# Altium PCB EVB_gate driver.PcbDoc
Units mm, origin at the board's own origin, x right, y up, seen from the top; angles counter-clockwise.
Board outline 29.97 x 33.27 mm, 2 copper layers (TOP Assembly Layer, Bottom Layer), stack 0.142 mm thick; 26 components, 19 nets, 81 pads, 8 vias.
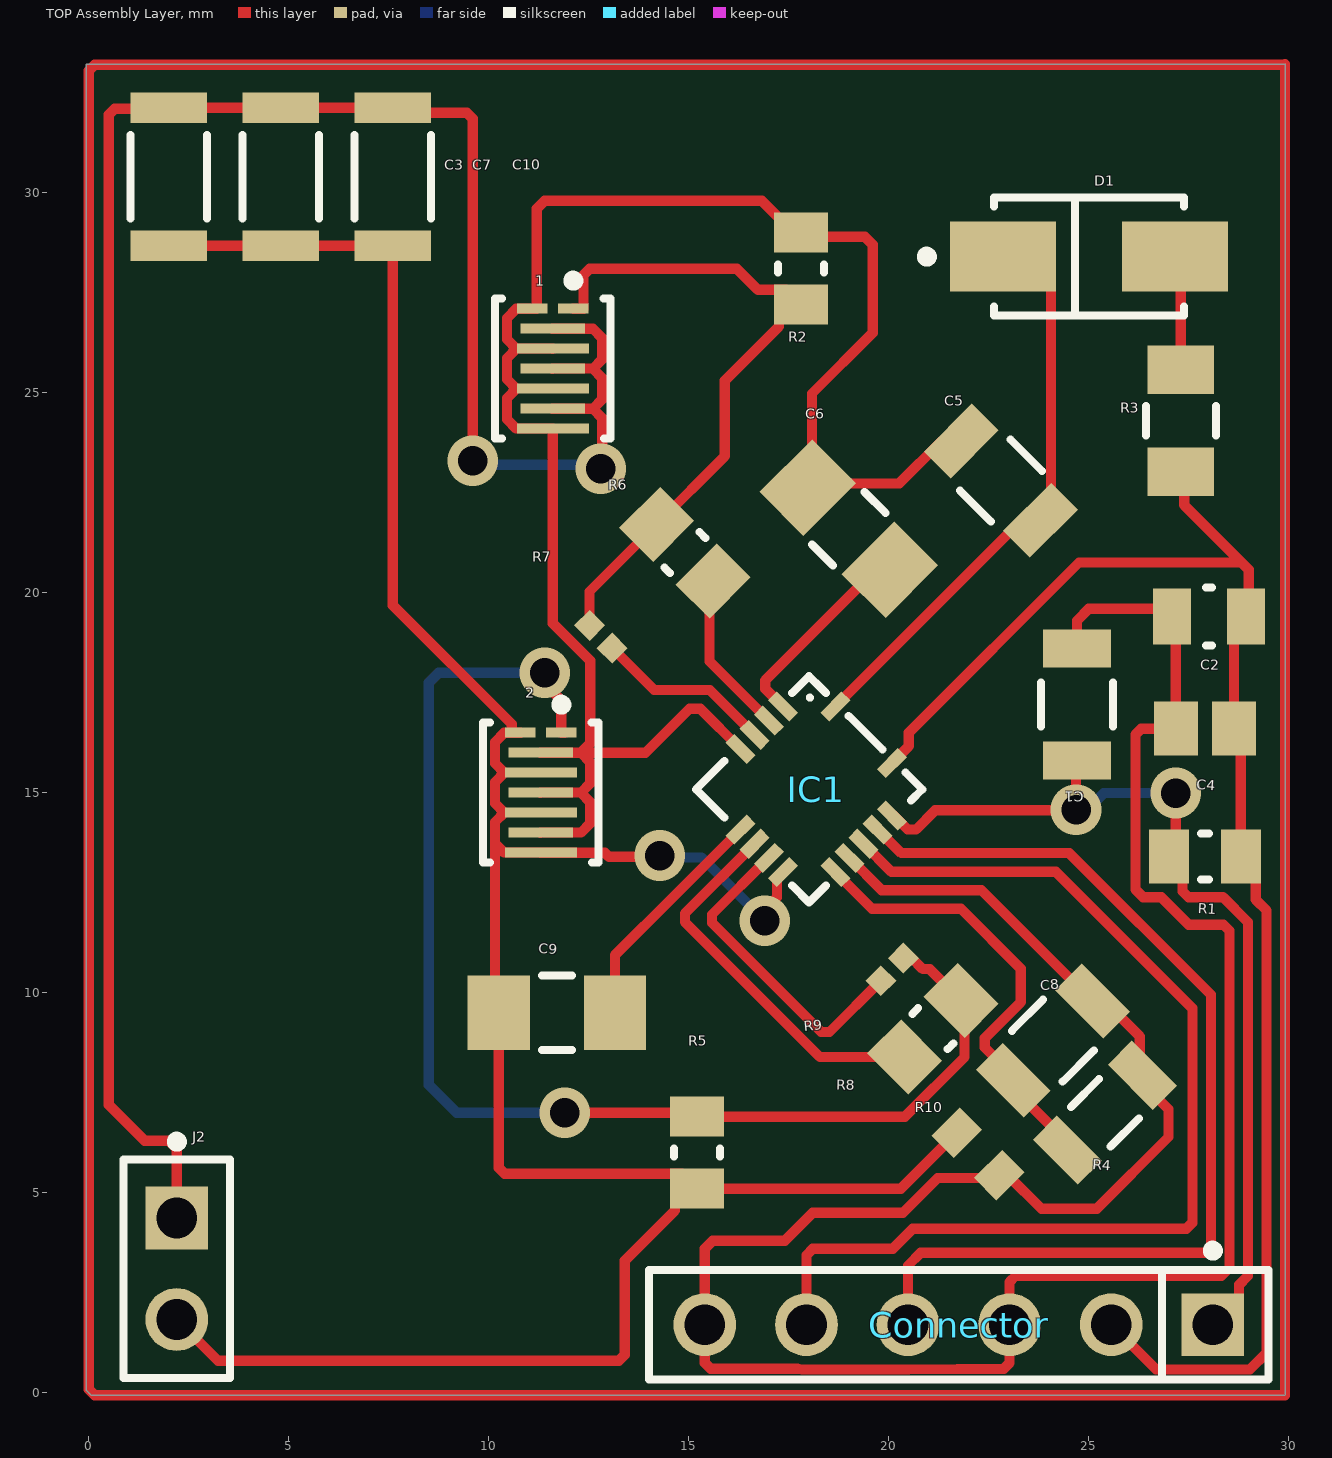
[diagram p0: TOP Assembly Layer view]
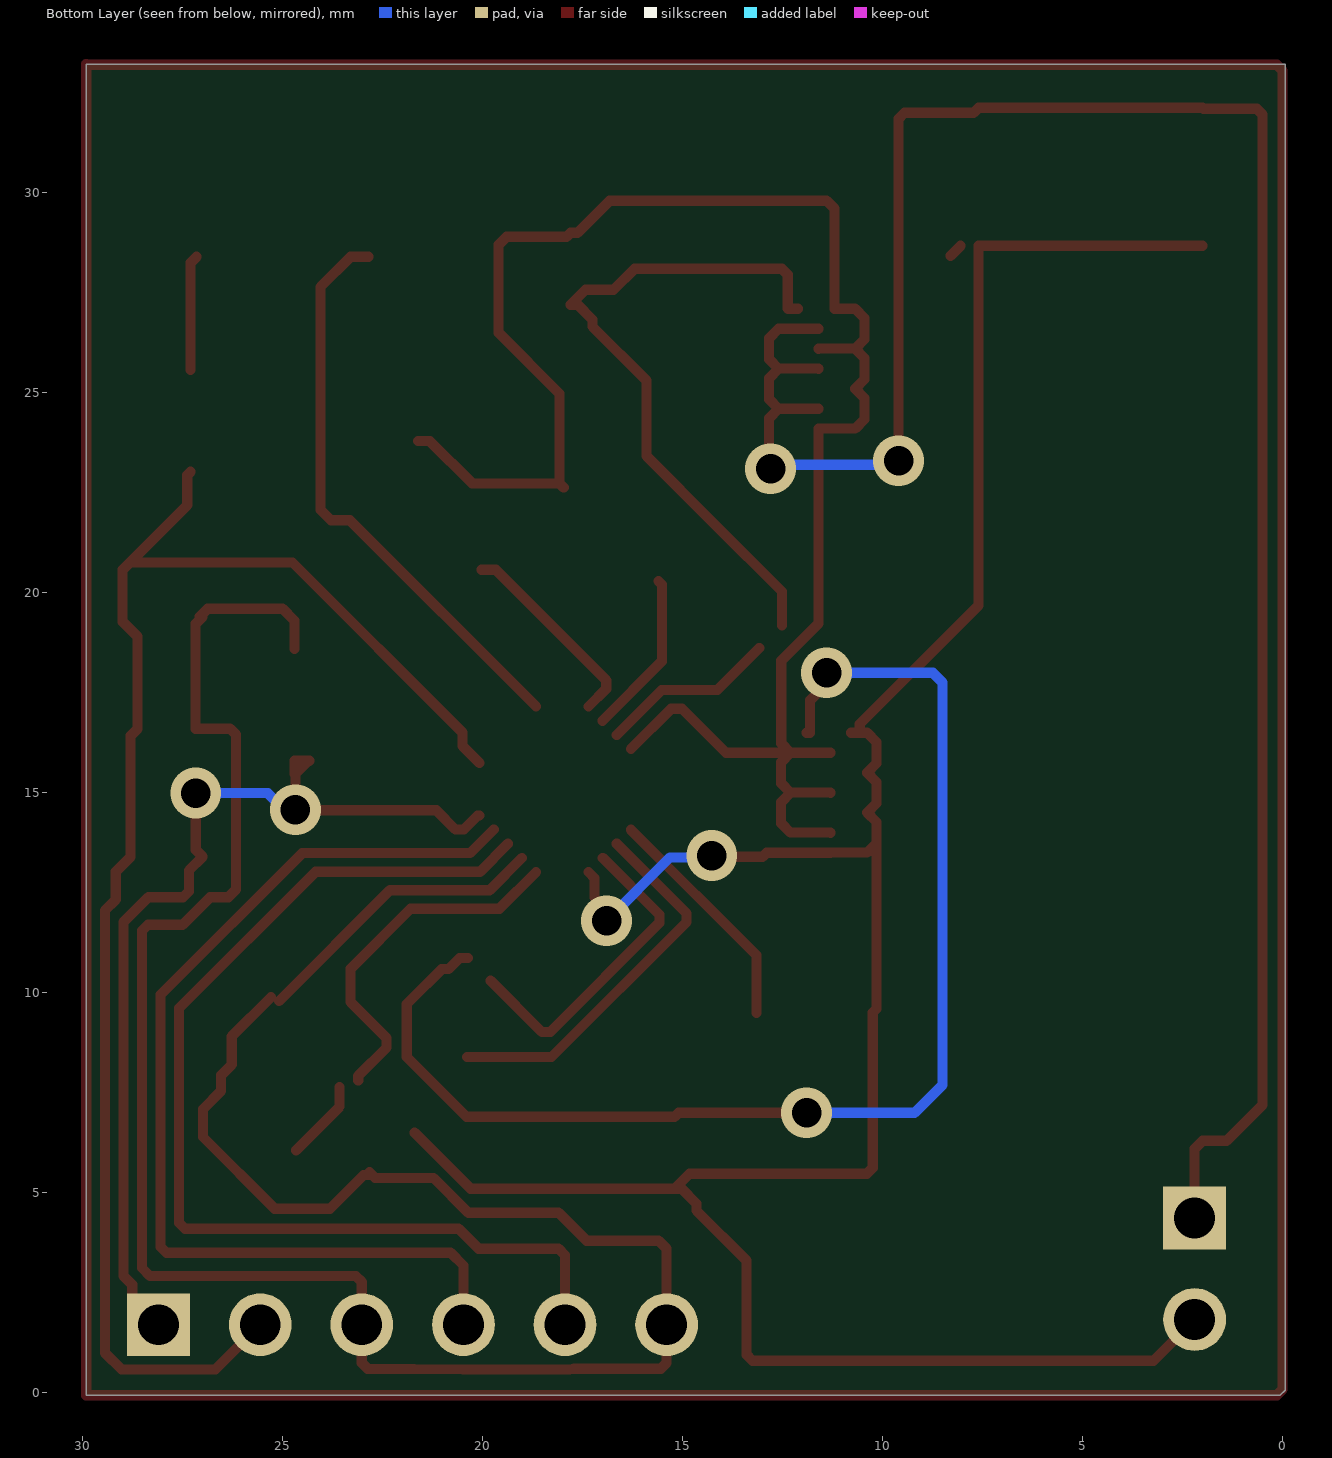
[diagram p1: Bottom Layer view, seen from below]
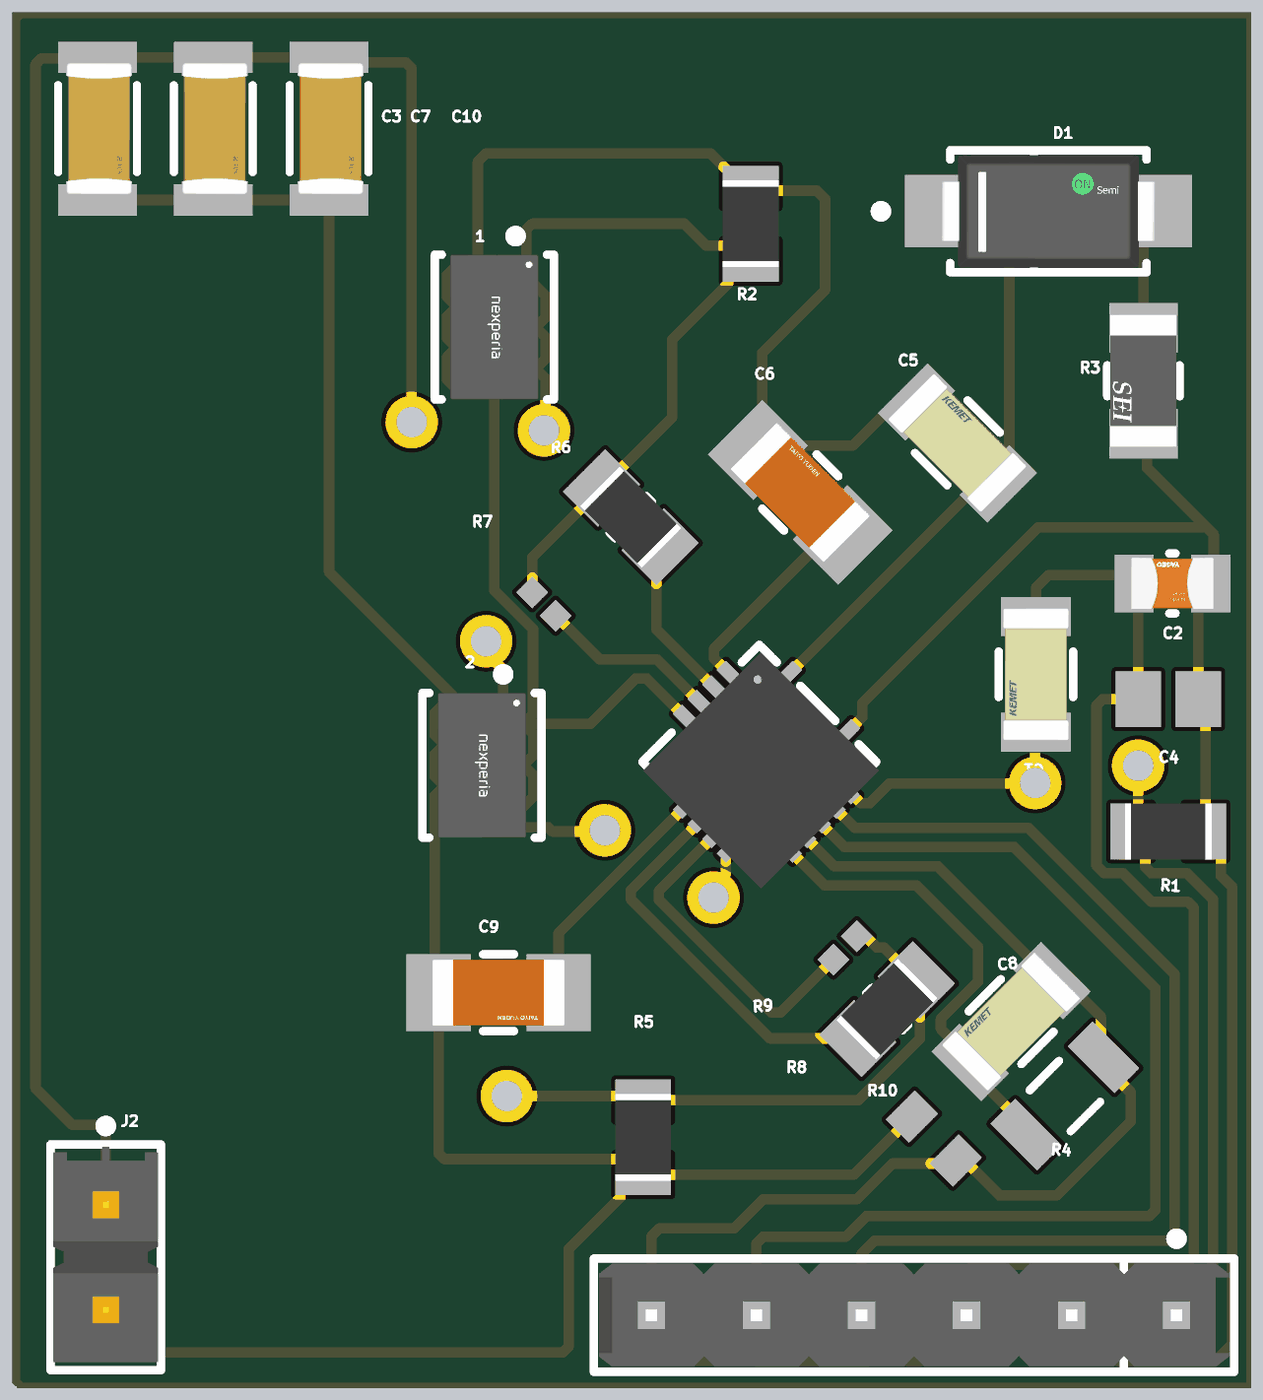
[diagram p2: 3D render of the assembled board from above, using the file's embedded part models]

## Layer stack, top to bottom
Top Solder: solder mask 0.0102, Solder Resist, Dk 3.5
TOP Assembly Layer: signal copper 0.0356
Dielectric 2: prepreg 0.0711, PP-006, Dk 4.29
Bottom Layer: signal copper 0.0356
Bottom Solder: solder mask 0.0102, Solder Resist, Dk 3.5

## Board outline
29.909,-0.064 29.909,33.21 -0.064,33.21 -0.064,0.064 0.064,-0.064

## Design rules (kind name [scope] priority, off if disabled: settings)
Clearance [All] p1: gap=0.21 ignorepadtopadclearanceinfootprint=TRUE
PolygonConnect [All] p1: connectstyle=Relief reliefconductorwidth=0.254 reliefentries=4 polygonreliefangle="90 Angle" airgapwidth=0.254
RoutingVias [All] p1: holewidth=0.74 width=1.27 viastyle="Through Hole" minholewidth=0.74 minwidth=1.27 maxholewidth=0.74 maxwidth=1.27
SolderMaskExpansion [All] p1: expansion=0.102 istentingtop=FALSE
SupplyNets "Schematic Supply Nets" [InNet('GND')] p1: voltage=0.000
UnRoutedNet [All] p1: checkbadconnections=TRUE
Width [All] p1: maxlimit=0.254 minlimit=0.254 preferedwidth=0.254
29 further rules are at their usual default settings.

## Components (designator, comment, footprint, x,y, rotation, side; value= is the part's Value field where it differs from the comment)
1 "GAN3R2-100CBE" FP-WLCSP8-SOT8072-MFG 11.6,25.6 r270 top
2 "GAN3R2-100CBE" FP-WLCSP8-SOT8072-MFG 11.3,15 r270 top
C1 "10PF" FP-C1206C-EB-MFG 24.7,17.2 r90 top value="10 pF"
C2 "1uF" FP-CC0805-0_85-MFG 28,19.4 r180 top value="1 uF"
C3 "50u" FP-CGA5L-0_3-0_1-IPC_B 4.8,30.4 r270 top
C4 "100nF" CAPC2013X145X48LL20T23 27.9,16.6 r180 top
C5 "470uF" FP-C1206C-EB-MFG 22.8,22.8 r315 top value="0.47 μF"
C6 "1uF" FP-1206-L_3_2_0_15-W_1_6-IPC_A 19,21.6 r315 top
C7 "100uF" FP-CGA5L-0_3-0_1-IPC_B 2,30.4 r270 top
C8 "0.1uF" FP-C1206C-EB-MFG 24.1,8.8 r45 top value="0.10 μF"
C9 "1uF" FP-1206-L_3_2_0_15-W_1_6-IPC_A 11.7,9.5 r180 top
C10 "10u" FP-CGA5L-0_3-0_1-IPC_B 7.6,30.4 r270 top
Connector "" FP-22-28-4060-MFG 21.75,1.7 r180 top
D1 "ES1J" FP-403AE-MFG 25,28.4 r0 top value=10pF
IC1 "NCP51820" NCP51820 18.008,15.085 r315 top
J2 "TSW-102-07-F-S" FP-TSW-102-07-F-S-MFG 2.2,3.1 r270 top
R1 "10K" RESC2013X60X35NL10T20 27.9,13.4 r0 top
R2 "10" RESC2013X60X35NL10T20 17.8,28.1 r270 top
R3 "2.0" FP-RMCF1206-IPC_C 27.3,24.3 r270 top
R4 "60.4" RESC3116X65X40LL10T20 25.4,7 r45 top
R5 "10" RESC2013X60X35NL10T20 15.2,6 r90 top
R6 "10" RESC2013X60X35ML10T20 14.9,21 r315 top
R7 "2.0" RESC0201(0603)_M 12.8,18.9 r315 top value="2.00 Ohm"
R8 "10" RESC2013X60X35ML10T20 21.1,9.1 r225 top
R9 "2.0" RESC0201(0603)_M 20.083,10.583 r225 top value="2.00 Ohm"
R10 "0" RESC1608X55X25ML10T15 22.23,5.97 r315 top

## Footprints (in the part's own frame and the unit in brackets; to place one, negate y for a bottom-side part, rotate by r counter-clockwise, add the part's x,y. Pads: shape width x height; smd on the part's side, far side on the other; paste and mask are expansions set on the pad)
CAPC2013X145X48LL20T23 [mm] "Chip Capacitor, 2-Leads, Body 2.00x1.25mm, IPC High Density"
  rect 1.1x1.35 smd: 1(-0.725,0) 2(0.725,0)
  body extent -1.1,-0.72 1.1,0.72, height 1.45
FP-22-28-4060-MFG [mm]
  rect 1.57x1.57 hole 1.02 paste-2539.97 mask+0: 1(-6.35,0)
  round 1.57 hole 1.02 paste-2539.97 mask+0: 2(-3.81,0) 3(-1.27,0) 4(1.27,0) 5(3.81,0) 6(6.35,0)
  silkscreen extent -7.75,-1.97 7.75,1.37, body extent -7.85,-1.47 7.85,1.47, height 0.25
FP-403AE-MFG [mm]
  rect 2.65x1.75 smd paste+0 mask+0: 1(-2.15,0) 2(2.15,0)
  silkscreen extent -4.17,-1.48 2.37,1.48, body extent -3.57,-1.58 3.57,1.58, height 0.25
FP-1206-L_3_2_0_15-W_1_6-IPC_A [mm]
  rect 1.555x1.858 smd paste+0 mask+0: 1(-1.451,0) 2(1.451,0)
  silkscreen extent -0.37,-0.93 0.37,0.93, body extent -2.73,-1.43 2.73,1.43, height 0.25
FP-C1206C-EB-MFG [mm]
  rect 0.95x1.7 smd paste+0 mask+0: 1(-1.4,0) 2(1.4,0)
  silkscreen extent -0.55,-0.9 0.55,0.9, body extent -2,-1 2,1, height 0.25
FP-CC0805-0_85-MFG [mm]
  rect 0.95x1.4 smd paste+0 mask+0: 1(-0.925,0) 2(0.925,0)
  silkscreen extent -0.08,-0.72 0.08,0.72, body extent -1.6,-1.05 1.6,1.05, height 0.25
FP-CGA5L-0_3-0_1-IPC_B [mm]
  rect 0.756x1.906 smd paste+0 mask+0: 1(-1.725,0) 2(1.725,0)
  silkscreen extent -1.05,-0.95 1.05,0.95, body extent -2.35,-1.2 2.35,1.2, height 0.25
FP-RMCF1206-IPC_C [mm]
  rect 1.204x1.658 smd paste+0 mask+0: 1(-1.276,0) 2(1.276,0)
  silkscreen extent -0.37,-0.87 0.37,0.87, body extent -1.98,-0.97 1.98,0.97, height 0.25
FP-TSW-102-07-F-S-MFG [mm]
  rect 1.57x1.57 hole 1.02 paste-2539.97 mask+0: 1(-1.27,0)
  round 1.57 hole 1.02 paste-2539.97 mask+0: 2(1.27,0)
  silkscreen extent -3.3,-1.34 2.73,1.34, body extent -2.83,-1.44 2.83,1.44, height 0.25
FP-WLCSP8-SOT8072-MFG [mm]
  rect 0.25x0.77 smd paste-1000 mask+0: 1(-1.5,0.512) 2(-1.5,-0.513)
  rect 0.25x1.62 smd paste-1000 mask+0: 3(-1,0) 5(0,0) 7(1,0)
  rect 0.25x1.8 smd paste-1000 mask+0: 4(-0.5,0) 6(0.5,0) 8(1.5,0)
  silkscreen extent -2.32,-1.44 1.75,1.44, body extent -1.85,-1.17 1.85,1.17, height 0.25
NCP51820 [mm]
  rect 0.75x0.32 smd: 1(-1.925,1) 2(-1.925,0.5) 3(-1.925,0) 4(-1.925,-0.5) 9(1.925,-1) 10(1.925,-0.5) 11(1.925,0) 12(1.925,0.5) 13(1.925,1)
  rect 0.32x0.75 smd: 5(-0.5,-1.925) 6(0,-1.925) 7(0.5,-1.925) 8(1,-1.925) 14(1,1.925) 15(-1,1.925)
  silkscreen extent -2,-2 2,2, body extent -1.84,-2.14 2.2,1.9, height 0.89
RESC0201(0603)_M [mm] "Chip Resistor, Body 0.6x0.3mm, IPC Low Density"
  rect 0.55x0.55 smd: 1(-0.4,0) 2(0.4,0)
  body extent -0.31,-0.16 0.31,0.16, height 0.3
RESC1608X55X25ML10T15 [mm] "Chip Resistor, 2-Leads, Body 1.60x0.80mm, IPC Low Density"
  rect 0.8x1 smd: 1(-0.75,0) 2(0.75,0)
  body extent -0.85,-0.45 0.85,0.45, height 0.55
RESC2013X60X35ML10T20 [mm] "Chip Resistor, 2-Leads, Body 2.1x1.35mm, IPC Low Density"
  rect 1.2x1.45 smd: 1(-1,0) 2(1,0)
  silkscreen extent -0.1,-0.63 0.1,0.63, body extent -1.05,-0.68 1.05,0.67, height 0.6
RESC2013X60X35NL10T20 [mm] "Chip Resistor, 2-Leads, Body 2.1x1.35mm, IPC Medium Density"
  rect 1x1.35 smd: 1(-0.9,0) 2(0.9,0)
  silkscreen extent -0.1,-0.58 0.1,0.58, body extent -1.05,-0.68 1.05,0.67, height 0.6
RESC3116X65X40LL10T20 [mm] "Chip Resistor, 2-Leads, Body 3.10x1.60mm, IPC High Density"
  rect 0.85x1.6 smd: 1(-1.325,0) 2(1.325,0)
  silkscreen extent -0.5,-0.7 0.5,0.7, body extent -1.6,-0.85 1.6,0.85, height 0.65

## Part data
1 2: library part GAN3R2-100CBE_1, "GAN3R2-100CBE                                                                                                                                                                                                                                                     100 V, 3.2 mOhm Gallium Nitride (GaN) FET in a 3.5 mm x 2.13 mm Wafer Level Chip", Continuous Drain Current (ID)=60A, Drain to Source Breakdown Voltage=100V, Drain to Source Resistance=2.4mΩ, Gate to Source Voltage (Vgs)=-4V, Max Junction Temperature (Tj)=150°C, Min Operating Temperature=-40°C, Power Dissipation=394W, Drain to Source Voltage (Vdss)=100V, Height=464µm, Max Operating Temperature=150°C, MPN=GAN3R2-100CBE, NexarPartId=136220986, Number of Channels=1
C1: library part CMP-1037-00647-2, "CAP CER 10PF 50V C0G/NP0 1206", Capacitance="10 pF", Manufacturer=KEMET, Manufacturer Part Number=C1206C100J5GACTU, Package=C1206C-EB, Temperature="-55°C to +150°C", Temperature Characteristic=C0G, Temperature Coefficient=15%, Temperature Range High=+150°C, Temperature Range Low=-55°C, Tolerance=0.05, Voltage Rating="50 V", Automotive=Yes, Automotive Grade="Grade 0", Category=Cap, ComponentLink2Description=Datasheet, ComponentLink2URL=https://content.kemet.com/datasheets/KEM_C1007_X8R_ULTRA_150C_SMD.pdf, Device Class L1="Passive Components", Device Class L2=Capacitors, Device Class L3="Ceramic Capacitors", Digikey Description="CAP CER 10PF 50V C0G/NP0 1206", Height=0.88mm, Ipc Land Pattern Name=CAPC320160X78, Lead Free=Yes, Material=Ceramic, Mouser Description="Multilayer Ceramic Capacitors MLCC - SMD/SMT 50volts 10pF C0G 5%", Octopart=https://octopart.com/c1206c100j5gactu-kemet-87062, RoHS=TRUE
C2: library part CMP-03422-000001-1, "CAP CER 1UF 16V X7R 0805", Capacitance="1 uF", Manufacturer=Yageo, Manufacturer Part Number=CC0805KKX7R7BB105, Package=CC0805-0.85, Temperature="-30°C to +85°C", Temperature Characteristic=X7R, Temperature Range High=+85°C, Temperature Range Low=-30°C, Tolerance=0.1, Voltage Rating="16 V", Automotive=No, Category=Cap, ComponentLink2Description=Datasheet, ComponentLink2URL=http://www.yageo.com/documents/recent/UPY-GPHC_Y5V_6.3V-to-50V_8.pdf, Device Class L1="Passive Components", Device Class L2=Capacitors, Device Class L3="Ceramic Capacitors", Digikey Description="CAP CER 1UF 16V X7R 0805", Footprint Url=http://www.yageo.com/exep/pages/download/literatures/UPY-C_GEN_24.pdf, Height=0.95mm, Ipc Land Pattern Name=CAPC200125X85, Lead Free=Yes, Material=Ceramic, Mouser Description="Multilayer Ceramic Capacitors MLCC - SMD/SMT 1.0uF 16V X7R 10%", Octopart=https://octopart.com/cc0805kkx7r7bb105-yageo-8376555, RoHS=TRUE
C3 C7 C10: library part CMP-08246-001673-1, "Cap Ceramic 100nF 450V X7T 10% Pad SMD 1206 +125°C Automotive T/R", Capacitance=100nF, Case Code (Imperial)=1206, Case Code (Metric)=3216, Dielectric=X7T, Max Operating Temperature=125°C, Min Operating Temperature=-55°C, Package Quantity=1, Ratings=AEC-Q200, Tolerance=10%, Voltage Rating=450V, Case/Package=1206, Depth=1.6mm, Features="Soft Termination", Height=1.6mm, Lead Free="Lead Free", Length=3.2mm, Mount="Surface Mount", Packaging="Tape and Reel", REACH SVHC="No SVHC", Termination=SMD/SMT, Thickness=0.075inch, Voltage Rating (DC)=450V, Weight=0.000571oz, Width=0.063inch
C4: library part CMP-2007-03166-1, Manufacturer=Vitramon, Part Number=VJ0805Y104JXXAT
C5: library part CMP-1037-04557-2, "CAP CER 0.47UF 25V X5R 1206", Capacitance="0.47 μF", Manufacturer=KEMET, Manufacturer Part Number=C1206C474K3PACTU, Package=C1206C-EB, Temperature="-55°C to +150°C", Temperature Characteristic=X5R, Temperature Coefficient=15%, Temperature Range High=+150°C, Temperature Range Low=-55°C, Tolerance=0.1, Voltage Rating="25 V", Automotive=Yes, Automotive Grade="Grade 0", Category=Cap, ComponentLink2Description=Datasheet, ComponentLink2URL=https://content.kemet.com/datasheets/KEM_C1007_X8R_ULTRA_150C_SMD.pdf, Device Class L1="Passive Components", Device Class L2=Capacitors, Device Class L3="Ceramic Capacitors", Digikey Description="CAP CER 0.47UF 25V X5R 1206", Height=0.88mm, Ipc Land Pattern Name=CAPC320160X78, Lead Free=Yes, Material=Ceramic, Mouser Description="Multilayer Ceramic Capacitors MLCC - SMD/SMT 25volts 0.47uF X5R 10%", Octopart=https://octopart.com/c1206c474k3pactu-kemet-16430430, RoHS=TRUE
C6 C9: library part CMP-14477-003409-2, "None", Case Code (Imperial)=1206, Case Code (Metric)=3216, Dielectric=X5R, Max Operating Temperature=85°C, Min Operating Temperature=-55°C, Package Quantity=1, Resistor Type=Ceramic, Tolerance=10%, Voltage=25V, Capacitance=1uF, Case/Package=1206, Construction=Flat, Depth=1.6mm, Halogen Free="Halogen Free", Height=0.85mm, Lead Free="Lead Free", Length=3.2mm, Mount="Surface Mount", Number of Pins=2, Packaging="Tape and Reel", Radiation Hardening=No, RoHS Compliant=Yes, Series=M, Termination=SMD/SMT, Thickness=0.037inch, Voltage Rating=25V, Voltage Rating (DC)=25V, Width=0.063inch
C8: library part CMP-03020-001014-1, "CAP CER 0.1UF 25V 10% X7R 1206", Capacitance="0.10 μF", Manufacturer=KEMET, Manufacturer Part Number=C1206C104K3RACTU, Package=C1206C-EB, Temperature="-55°C to +150°C", Temperature Characteristic=X7R, Temperature Coefficient=15%, Temperature Range High=+150°C, Temperature Range Low=-55°C, Tolerance=0.1, Voltage Rating="25 V", Automotive=Yes, Automotive Grade="Grade 0", Category=Cap, ComponentLink2Description=Datasheet, ComponentLink2URL=https://content.kemet.com/datasheets/KEM_C1007_X8R_ULTRA_150C_SMD.pdf, Device Class L1="Passive Components", Device Class L2=Capacitors, Device Class L3="Ceramic Capacitors", Digikey Description="CAP CER 0.1UF 25V 10% X7R 1206", Height=0.88mm, Ipc Land Pattern Name=CAPC320160X78, Lead Free=Yes, Material=Ceramic, Mouser Description="CAP CER 0.1UF 25V X7R 1206", Octopart=https://octopart.com/c1206c104k3ractu-kemet-9144317, RoHS=TRUE
Connector: library part CMP-04776-000763-1, "CONN HEADER VERT 6POS 2.54MM", Color=Black, Contact Resistance=20mR, Current Rating=4A, Max Operating Temperature=75°C, Max Voltage Rating (AC)=250V, Max Voltage Rating (DC)=250.25kV, Min Operating Temperature=0°C, MPN=22-28-4060, Package Quantity=1, Connector Type="Male Pin", Contact Material=Brass, Contact Mating Length=0.24inch, Contact Plating=Tin, Contact Type="Male Pin", Depth=2.49mm, Gender=Male, Housing Color=Black, Housing Material=Thermoplastic, Length=15.24mm, Mount="Through Hole", Number Of Contacts=6, Number of Positions=6, Number Of Rows=1, Orientation=Straight, Packaging=Bulk, Pitch=2.54mm, RoHS Compliant=Yes, Series="KK® 42375", Termination=Solder, Voltage Rating=250V
D1: library part CMP-07163-000025-1, "DIODE GEN PURP 400V 1A SMA", Capacitance=10pF, Forward Current=1A, Manufacturer="ON Semiconductor", Manufacturer Part Number=ES1G, Max Junction Temp=+150°C, Max Repetitive Reverse Voltage=400V, Max Surge Forward Current=30A, Package=403AE, Peak Reverse Current=5uA, Temperature="to +150°C", Automotive=No, Category=Diode, ComponentLink2Description=Datasheet, ComponentLink2URL=https://www.onsemi.com/pub/Collateral/ES1J-D.PDF, Device Class L1="Discrete Semiconductors", Device Class L2=Diodes, Device Class L3="Rectifier Diodes", Digikey Description="DIODE GEN PURP 400V 1A SMA", Footprint Url=https://www.onsemi.com/pub/Collateral/403AE.PDF, Height=2.5mm, Lead Free=Yes, Mouser Description="Rectifiers 1.0 A Ultra Fast Recovery Rect", MPN=ES1J, Octopart=https://octopart.com/es1g-on+semiconductor-84324858, RoHS=TRUE, Standoff Height=0.05mm, Temperature Range High=+150°C
IC1: "Integrated Circuit", Manufacturer_Name=onsemi, Mouser Part Number=N/A, Datasheet Link=https://www.onsemi.com/download/data-sheet/pdf/ncp51820-d.pdf, Height=0.9mm, Manufacturer_Part_Number=NCP51820, Mouser Price/Stock=https://www.mouser.co.uk/ProductDetail/onsemi/NCP51820?qs=vEM7xhTegWhaPMdkL3AwCA%3D%3D, MPN=NCP51820
J2: library part CMP-02766-001458-1, "CONN HEADER VERT 2POS 2.54MM", Color=Black, Flammability Rating="UL94 V-0", Max Current Rating=7.6A, Max Operating Temperature=125°C, Max Voltage Rating (AC)=550V, Min Operating Temperature=-55°C, Package Quantity=1, Connector Type=Header, Contact Finish - Mating=GOLD, Contact Material=Bronze, Contact Mating Length=0.23inch, Contact Plating=Gold, Contact Shape=Square, Contact Type="Male Pin", Depth=2.54mm, Fastening Type=Pull, Gender=Male, Housing Color=Black, Housing Material=Polyester, Insulation Color=Black, Insulation Material=PBT, Length=5.08mm, Mount="Through Hole", Number Of Contacts=2, Number of Positions=2, Number Of Rows=1, Orientation=Straight, Packaging=Bulk, Pitch=2.54mm, Radiation Hardening=No, REACH SVHC="No SVHC", RoHS Compliant=Yes, Series=TSW, Termination=Solder
R1 R2 R5: library part CMP-1659-00013-4, "Chip Resistor, 10 KOhm, +/- 1%, 0.125 W, -55 to 155 degC, 0805 (2012 Metric), RoHS, Tape and Reel", Manufacturer=Yageo, Max Operating Temperature="155 degC", Min Operating Temperature="-55 degC", Package Quantity=5000, Voltage Rating="150 V", ComponentLink1Description="Manufacturer URL", ComponentLink1URL=http://www.yageo.com/, ComponentLink2Description=Datasheet, ComponentLink2URL=http://www.yageo.com/documents/recent/PYu-RC_Group_51_RoHS_L_04.pdf, DatasheetVersion="Rev. 4, 02/2016", Height="0.5 mm", Length="2 mm", Mount="Surface Mount", Mounting Technology="Surface Mount", PackageDescription="2-Pin Surface Mounted Device, Body 2 x 1.25 mm", PackageReference=0805, Packaging="Tape and Reel", Pins=2, REACH SVHC="No SVHC", RoHSCompliant=true
R3: library part CMP-26527-002749-1, "RES 2 OHM 1% 1/4W 1206", Case Code (Imperial)=1206, Case Code (Metric)=3216, Max Operating Temperature=155°C, Max Power Dissipation=250mW, Min Operating Temperature=-55°C, Package Quantity=5000, Resistance=2R, Resistor Type="Thick Film", Temperature Coefficient=200ppm/°C, Tolerance=1%, Case/Package=1206, Contact Plating=Tin, Features="Automotive AEC-Q200", Height=0.028inch, Lead Free="Lead Free", Length=0.126inch, Mount="Surface Mount", Number of Terminations=2, Packaging="Tape and Reel", Radiation Hardening=No, RoHS Compliant=Yes, Series=RMCF, Width=0.063inch
R4: library part CMP-2003-03498-1, Manufacturer=Yageo, Part Number=RC1206FR-1360R4L
R6 R8: library part CMP-2100-03670-1, "Chip Resistor, 10 Ohm, +/- 1%, 0.125 W, -55 to 155 degC, 0805 (2012 Metric), RoHS, Tape and Reel", Case Code (Imperial)=0805, Case Code (Metric)=2012, Manufacturer=Yageo, Max Operating Temperature=155degC, Max Power Dissipation=125mW, Min Operating Temperature=-55degC, Package Description="2-Pin Surface Mounted Device, Body 2 x 1.25 mm", Package Quantity=1, Resistance=10Ohm, Temperature Coefficient=200ppm/degreesC, Tolerance=1%, Voltage Rating=150V, Case/Package=0805, Composition=ThickFilm, Datasheet URL=http://www.yageo.com/NewPortal/yageodocoutput?fileName=/pdf/R-Chip/PYu-RC_Group_51_RoHS_L_5.pdf, Datasheet Version="Rev. 5, 10/2016", Depth=1.25mm, Height=0.5mm, Lead Free=LeadFree, Length=2mm, Manufacturer URL=http://www.yageo.com/, Number of Pins=2, Number of Terminations=2, Package Reference=0805, Packaging=TapeandReel, Power Rating=125mW, REACH SVHC=NoSVHC, RoHSCompliant=true, Termination=SMD/SMT, Voltage Rating (DC)=150V, Width=1.25mm
R7 R9: library part CMP-1010-00009-1, "2R 0.05W 5% 0201 (0603 Metric)  SMD", Case-EIA=0201, Case-Metric=0603, Power="0.05 W", Tolerance="5 %", Technology=SMT
R10: library part CMP-2100-03667-1, "Chip Resistor, 0 Ohm, +/- 5%, 0.1 W, -55 to 155 degC, 0603 (1608 Metric), RoHS, Tape and Reel", Case Code (Imperial)=0603, Case Code (Metric)=1608, Manufacturer=Yageo, Max Operating Temperature=155degC, Min Operating Temperature=-55degC, MPN=RC0603JR−070RL, Package Description="2-Pin Surface Mount Device, Body 1.6 x 0.8 mm", Package Quantity=5000, Power Rating=100mW, Resistance=0mOhm, Temperature Coefficient=200ppm/degreesC, Tolerance=5%, Voltage Rating=50V, Case/Package=0603, Composition=ThickFilm, Contact Plating=Tin, Datasheet URL=http://www.yageo.com/NewPortal/yageodocoutput?fileName=/pdf/R-Chip/PYu-RC_Group_51_RoHS_L_5.pdf, Datasheet Version="Rev. 5, 10/2016", Depth=0.8mm, Height=0.45mm, Lead Free=LeadFree, Length=1.6mm, Manufacturer URL=http://www.yageo.com/, Military Standard=Not, Number of Pins=2, Package Reference=0603, Packaging=TapeandReel, Radiation Hardening=No, REACH SVHC=NoSVHC, RoHSCompliant=true, Termination=SMD/SMT, Voltage Rating (DC)=50V, Width=0.8mm

## Via types
v1: diameter 1.27, hole 0.74, TOP Assembly Layer to Bottom Layer, 8 vias

## Nets (pads, with @x,y where several pads share a name; then routed paths per layer and width w, separated by ;. In a path a pad name is that pad's centre, name@x,y a point inside that pad or via, vN(x,y) a via of type N, cw(c..) or ccw(c..) an arc to the next point about the centre after c; other vN are vias at no path point)
GND: C1.2 C2.2 C4.2 C8.2 Connector.3 Connector.6 IC1.10 R4.2 R10.2 | length 65.9
  TOP Assembly Layer w0.254: IC1.10 19.824,12.562 22.318,12.562 C8.2 ; R10.2 22.976,5.439 23.815,4.6 25.2,4.6 26.993,6.393 26.993,7.09 26.537,7.546 26.537,7.937 26.272,8.202 26.272,8.908 C8.2@25.29,9.89 ; R10.2@22.831,5.51 22.69,5.369 21.225,5.369 20.356,4.5 18.1,4.5 17.4,3.8 15.6,3.8 15.4,3.6 15.4,0.749 15.549,0.6 17.719,0.6 ccw(c17.94,1.7) 17.94,0.578 20.48,0.578 ccw(c20.48,1.7) 20.491,0.578 22.871,0.6 23.02,0.749 Connector.3 23.02,2.77 23.169,2.919 28.319,2.919 28.517,3.117 28.517,11.55 28.366,11.7 27.5,11.7 26.812,12.388 26.36,12.388 26.163,12.585 26.163,16.451 26.312,16.6 C4.2 ; C1.2 24.707,18.607 24.707,19.307 25,19.6 26.875,19.6 C2.2 ; C2.2@27,19.4 27.174,19.226 C4.2
Net1_1: 1.1 R2.2 R6.1 R7.1 | length 17.3
  TOP Assembly Layer w0.254: 1.1 12.368,27.1 12.37,27.102 12.37,27.951 12.519,28.1 16.2,28.1 16.727,27.573 17.427,27.573 R2.2 17.625,27.2 17.252,26.827 17.252,26.652 15.9,25.3 15.9,23.414 R6.1 12.517,20.031 R7.1
Net1_2: 1.2 1.4 1.6 1.8 2.3 2.5 2.7 C5.1 C6.1 IC1.4 R2.1 | length 47.9
  TOP Assembly Layer w0.254: 10.686,25.098 10.453,24.865 10.453,24.335 10.686,24.102 11.598,24.102 1.8 11.6,19.235 12.534,18.3 12.534,16.235 12.301,16.002 11.302,16.002 2.3 12.301,16 13.915,16 15.015,17.1 15.286,17.1 IC1.4 ; 10.686,25.102 10.453,25.335 10.453,25.865 10.686,26.098 ; 2.7 11.302,14.002 12.304,14.002 12.537,14.235 12.537,14.765 12.304,14.998 ; 2.5 11.302,15.002 12.304,15.002 12.537,15.235 12.537,15.765 12.304,15.998 ; 1.4 11.598,26.102 10.686,26.102 10.453,26.335 10.453,26.865 10.686,27.098 11.196,27.098 11.2,27.102 11.2,29.6 11.4,29.8 16.825,29.8 17.625,29 R2.1 17.9,28.9 19.4,28.9 19.6,28.7 19.6,26.5 18.081,24.981 C6.1@18.081,22.733 ; C6.1 C6.1@18.081,22.733 ; C5.1@21.61,23.79 21.318,23.79 20.261,22.733 C6.1@18.081,22.733
Net1_3: 1.3 1.5 1.7 C3.1 C7.1 C10.1 J2.1 | length 56.8
  TOP Assembly Layer w0.254: J2.1 2.2,6.1 2,6.3 1.4,6.3 0.5,7.2 0.5,31.951 0.649,32.1 1.975,32.1 C7.1 C3.1 C10.1 7.725,32 9.451,32 9.6,31.851 v1(9.6,23.3) ; 1.7 11.602,24.598 12.604,24.598 12.837,24.365 12.837,23.137 v1(12.8,23.1) ; 1.5 11.602,25.602 12.604,25.602 12.837,25.835 12.837,26.365 12.604,26.598 11.602,26.598 1.3 ; 12.604,24.602 12.837,24.835 12.837,25.365 12.604,25.598
  Bottom Layer w0.254: v1(9.6,23.3) 9.7,23.2 12.7,23.2 v1(12.8,23.1)
Net2_1: 2.1 R5.2 R8.1 R9.1 | length 32.5
  TOP Assembly Layer w0.254: v1(11.4,18) 11.4,17.725 11.812,17.313 2.1 2.1@11.9,16.5 ; v1(11.9,7) 15.1,7 R5.2 20.402,6.9 21.895,8.394 21.895,9.719 R8.1 21.025,10.589 20.852,10.589 20.575,10.866 R9.1
  Bottom Layer w0.254: v1(11.4,18) 8.749,18 8.5,17.751 8.5,7.7 9.2,7 v1(11.9,7)
Net2_2: 2.2 2.4 2.6 2.8 C3.2 C7.2 C9.2 C10.2 IC1.8 J2.2 R5.1 R10.1 | length 69.3
  TOP Assembly Layer w0.254: C7.2 C3.2 C10.2 7.6,19.687 10.572,16.716 10.572,16.502 10.574,16.5 2.2 ; J2.2 3.23,0.8 13.251,0.8 13.4,0.949 13.4,3.3 14.652,4.552 14.652,4.727 15.025,5.1 R5.1 ; C10.2@8.049,28.675 C10.2@8.3,28.424 ; 10.386,15.498 10.153,15.265 10.153,14.735 10.386,14.502 10.153,14.269 10.153,13.735 ; 10.386,15.502 10.153,15.735 10.153,16.265 10.386,16.498 2.2@10.574,16.498 ; v1(14.272,13.428) 14.245,13.4 13.001,13.4 12.901,13.5 2.8 11.298,13.502 10.386,13.502 10.153,13.735 ; v1(16.9,11.8) 16.9,12.075 17.202,12.376 17.202,12.865 IC1.8 ; R10.1 20.3,5.1 R5.1 ; 10.153,13.735 10.153,9.596 C9.2 10.249,5.622 10.397,5.473 14.827,5.473 R5.1
  Bottom Layer w0.254: v1(14.272,13.428) 14.316,13.384 15.316,13.384 v1(16.9,11.8) v1@16.9,12.043
NetC1_1: C1.1 Connector.1 IC1.13 R1.1 | length 24.9
  TOP Assembly Layer w0.254: IC1.13 20.123,14.431 20.472,14.082 20.682,14.082 21.16,14.56 24.3,14.56 v1@24.7,14.96 ; C1.1@24.325,15.8 C1.1 C1.1@24.7,15.471 ; C1.1@24.352,15.8 24.681,15.471 24.681,14.96 v1(24.681,14.573) ; v1(27.172,14.99) 27.172,13.572 R1.1 27.343,13.057 27.343,12.537 27.491,12.388 28.357,12.388 28.981,11.764 28.981,2.924 28.758,2.702 28.758,2.358 Connector.1
  Bottom Layer w0.254: v1(24.681,14.573) 24.956,14.573 25.374,14.99 v1(27.172,14.99)
NetC2_1: C2.1 C4.1 Connector.2 IC1.14 R1.2 R3.2 | length 38.7
  TOP Assembly Layer w0.254: IC1.14 20.5,16.163 20.5,16.5 24.754,20.754 28.746,20.754 ; Connector.2 26.682,0.578 29.025,0.578 29.445,0.998 29.445,12.056 29.173,12.327 29.173,13.027 R1.2 28.8,16.426 C4.1 28.626,18.901 29,19.275 29,19.4 29,19.525 29,20.575 27.385,22.19 27.385,22.94 R3.2
NetC5_2: C5.2 D1.1 IC1.15 | length 14.5
  TOP Assembly Layer w0.254: IC1.15 23.318,21.81 C5.2 24.055,22.075 24.055,27.645 23.3,28.4 D1.1
NetC6_2: C6.2 IC1.1 | length 5.1
  TOP Assembly Layer w0.254: IC1.1 16.909,17.598 16.909,17.809 19.674,20.574 C6.2
NetC8_1: C8.1 IC1.9 R4.1 | length 11.1
  TOP Assembly Layer w0.254: IC1.9 19.581,12.098 21.802,12.098 23.3,10.6 23.3,9.765 22.4,8.865 22.4,8.63 23.11,7.92 C8.1 ; C8.1@23.575,7.645 23.575,7.151 R4.1@24.663,6.063
NetC9_1: C9.1 IC1.5 | length 5.9
  TOP Assembly Layer w0.254: C9.1 13.151,10.936 14.647,12.432 14.652,12.432 16.293,14.073 IC1.5
NetConnector_4: Connector.4 IC1.12 | length 25.6
  TOP Assembly Layer w0.254: IC1.12 19.727,14.078 20.315,13.49 24.51,13.49 28.053,9.948 28.053,3.65 27.902,3.5 20.8,3.5 20.48,3.18 Connector.4
NetConnector_5: Connector.5 IC1.11 | length 27
  TOP Assembly Layer w0.254: Connector.5 17.94,3.44 18.1,3.6 20.1,3.6 20.6,4.1 27.44,4.1 27.589,4.249 27.589,9.611 24.174,13.026 20.063,13.026 19.369,13.72 IC1.11
NetD1_2: D1.2 R3.1 | length 2.9
  TOP Assembly Layer w0.254: D1.2 27.3,28.25 R3.1
NetIC1_2: IC1.2 R6.2 | length 4.1
  TOP Assembly Layer w0.254: R6.2 15.519,20.205 15.519,18.286 17,16.804 IC1.2
NetIC1_3: IC1.3 R7.2 | length 4.5
  TOP Assembly Layer w0.254: R7.2 14.134,17.566 15.523,17.566 16.642,16.446 IC1.3
NetIC1_6: IC1.6 R8.2 | length 9.6
  TOP Assembly Layer w0.254: IC1.6 14.901,11.979 14.901,11.768 18.276,8.393 R8.2
NetIC1_7: IC1.7 R9.2 | length 8.1
  TOP Assembly Layer w0.254: IC1.7 16.996,13.371 15.581,11.955 15.581,11.745 18.307,9.018 18.518,9.018 R9.2
copper on no net: | length 126.2
  TOP Assembly Layer w0.254: 29.9,33.2 0.149,33.2 0,33.051 0,0.085 0.149,-0.064 29.909,-0.064 29.909,33.21

## Polygon pours and split planes (outlines as drawn)
no net on Top Designator (solid): 5.75,17.75